# Altium PCB 400432.PcbDoc (part 4 of 7)
Units mm, origin at the board's own origin, x right, y up, seen from the top; angles counter-clockwise.
Board outline 136.53 x 63.5 mm, 4 copper layers (Top Layer, Mid-Layer 1, Mid-Layer 2, Bottom Layer), stack 1.505 mm thick; 354 components, 245 nets, 1470 pads, 1957 vias.
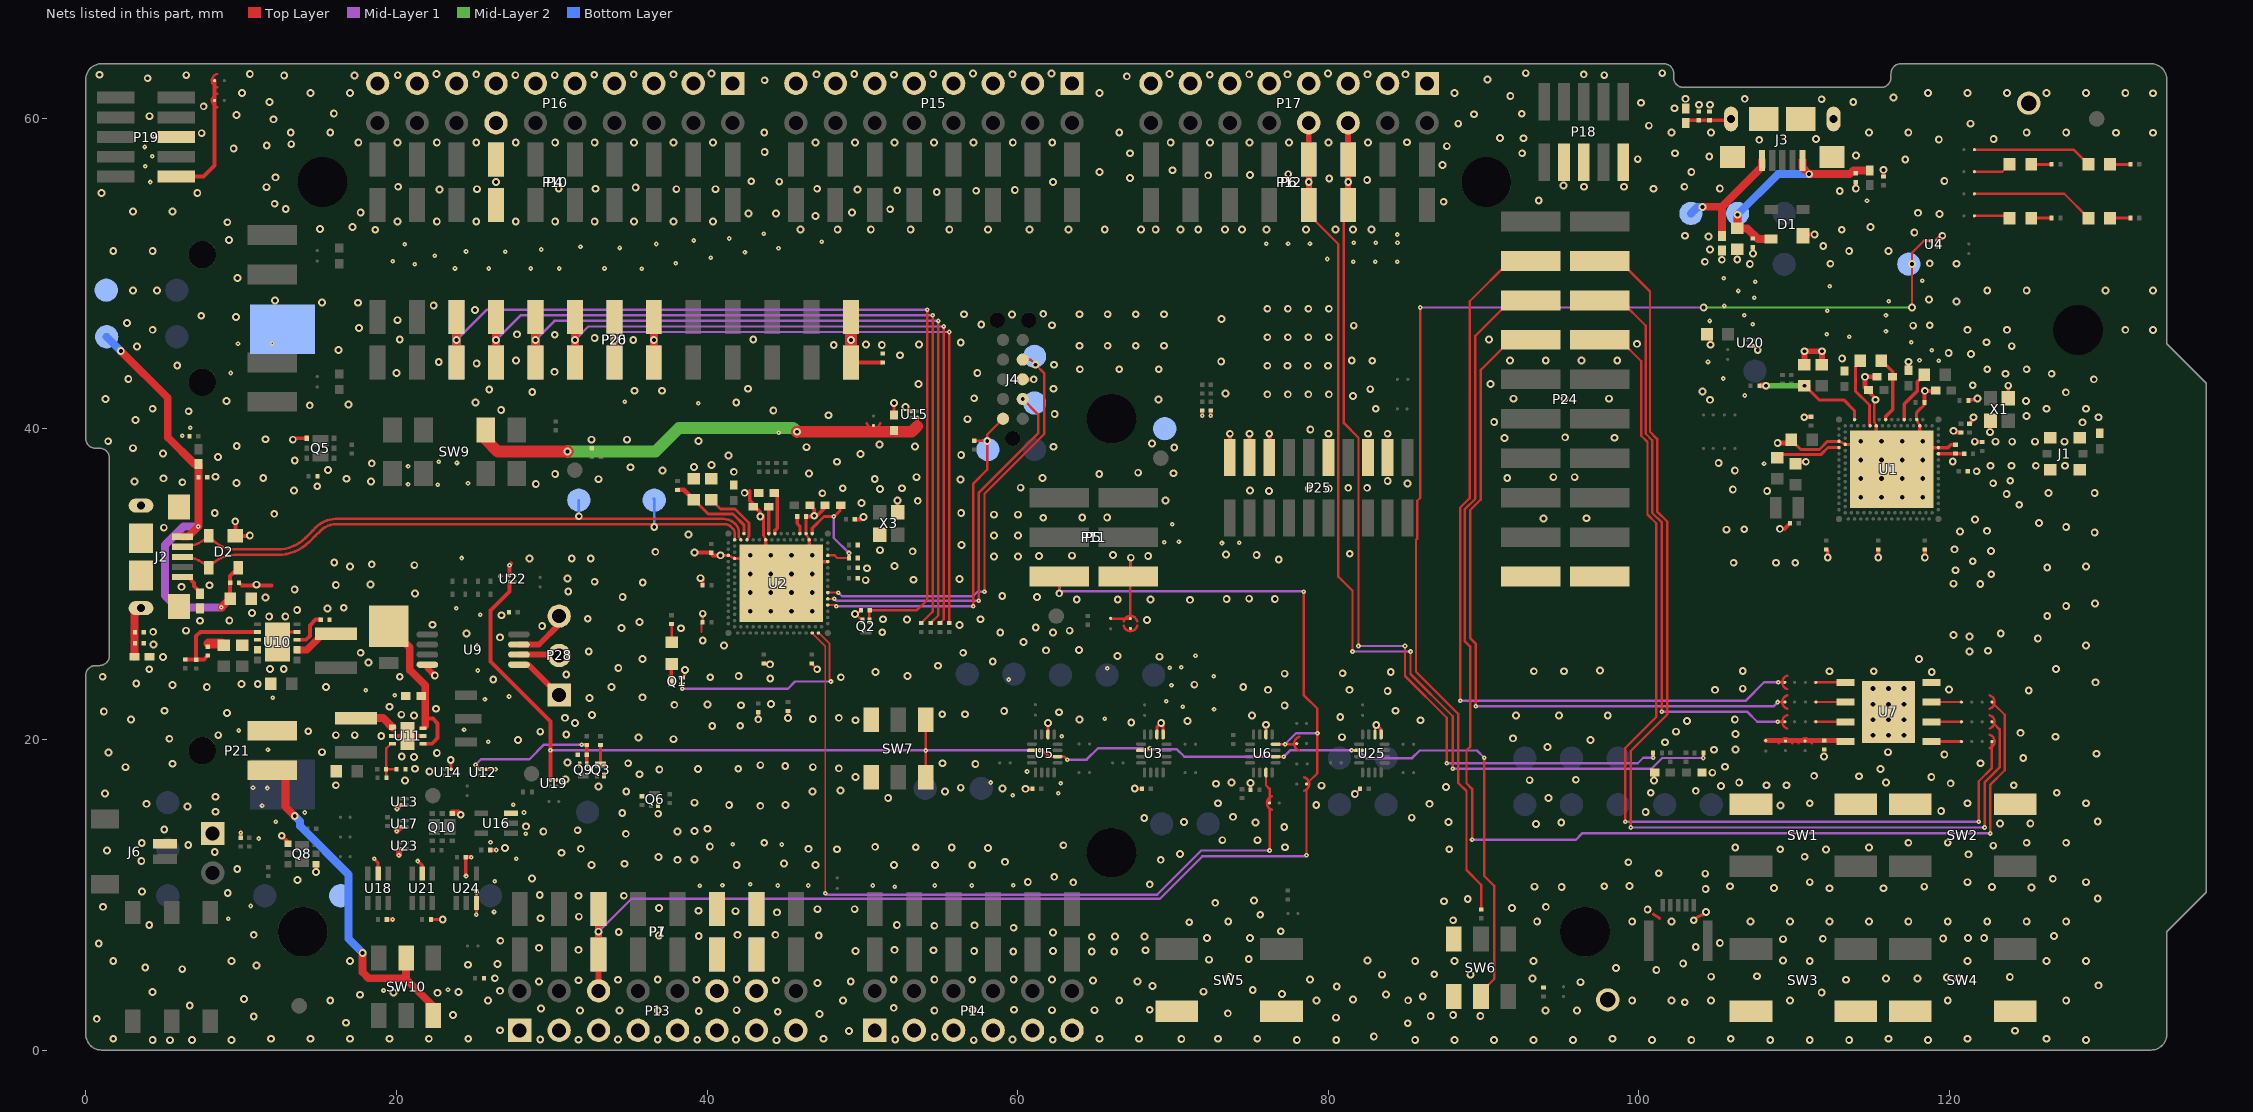
[diagram p5: the nets of this part, all layers, seen from the top]

## Via types
v1: diameter 0.5, hole 0.25, Top Layer to Bottom Layer, tented both sides, 1453 vias
v2: diameter 0.3, hole 0.1, Top Layer to Mid-Layer 1, tented top, 392 vias
v3: diameter 0.3, hole 0.1, Top Layer to Mid-Layer 1, tented both sides, 68 vias
v4: diameter 0.61, hole 0.305, Top Layer to Bottom Layer, tented both sides, 44 vias

## Nets (pads, with @x,y where several pads share a name; then routed paths per layer and width w, separated by ;. In a path a pad name is that pad's centre, name@x,y a point inside that pad or via, vN(x,y) a via of type N, cw(c..) or ccw(c..) an arc to the next point about the centre after c; other vN are vias at no path point) (continued)
GND: Bat1.2 C1.1 C2.2 C3.1 C4.2 C5.1 C6.2 C7.1 C8.2 C9.2 C10.2 C11.2 C12.2 C13.2 C14.2 C15.2 C16.1 C17.2 C18.2 C19.2 C20.2 C21.1 C22.2 C23.2 C24.1 C25.2 C26.1 C27.2 C28.1 C29.1 C30.2 C31.2 C32.2 C33.2 C34.2 C35.2 C36.2 C37.2 C38.1 C39.1 C40.2 C41.1 C42.1 C43.2 C44.1 C45.1 C46.1 C47.1 C48.1 C49.2 C50.1 C51.1 C52.1 C53.1 C54.1 C55.1 C56.1 C57.1 C59.1 C60.1 C61.1 C63.1 C64.1 C65.1 C66.1 C67.1 C68.1 C69.1 C70.1 C71.1 C72.2 C73.2 C74.1 D1.1 D2.1 FB3.2 FB4.2 FB5.2 FB6.2 J1.2 J4.3 J6.1 P1.6 P1.7 P4.7 P7.6 P7.7 P10.7 P13.1 P13.3 P13.5 P13.7 P13.9 P13.11 P13.12 P13.13 P13.14 P13.15 P14.1 P14.3 P14.5 P14.7 P14.9 P14.11 P15.1 P15.3 P15.5 P15.7 P15.9 P15.11 P15.13 P15.15 P16.1 P16.3 P16.5 P16.7 P16.9 P16.11 P16.13 P16.14 P16.15 P16.17 P16.19 P17.1 P17.3 P17.5 P17.7 P17.9 P17.11 P17.13 P17.15 P18.3 P18.5 P18.9 P19.5 P21.1 P24.19 P24.20 P25.3 P25.5 P25.9 P25.15 P25.17 P25.19 P27.1 Q1.2 Q2.2 Q3.2 Q5.1 Q6.2 Q8.1 Q8.4 Q9.2 Q10.1 R9.2 R11.2 R13.2 R25.2 R50.2 R52.2 R55.1 R56.1 R61.2 R62.1 R63.1 R66.2 R70.2 R73.2 R75.1 SB32.1 SW1.1 SW2.1 SW3.1 SW4.1 SW5.1 SW6.1 SW6.4 SW7.1 SW7.4 TP12.1 TP39.1 TP40.1 TP41.1 U1.104 U1.A25 U1.B12 U1.B26 U1.G1 U1.H2 U1.J31 U2.104 U2.A25 U2.B12 U2.B26 U2.G1 U2.H2 U2.J31 U3.5 U3.6 U4.B1 U5.6 U6.6 U7.4 U7.9 U9.4 U10.4 U10.8 U10.9 U10.11 U11.2 U11.5 U11.7 U12.B1 U13.B1 U14.B1 U15.B1 U16.3 U17.B1 U18.2 U19.B1 U20.B1 U21.2 U22.B1 U23.B1 U24.3 U25.5 U25.6 X1.2 X1.4 X3.2 X3.4 | length 109.7
  Top Layer w0.152: Q1.2@38.399,23.974 38.583,24.157 v1(38.583,24.46) ; 39.649,26.924 39.649,27.482 C36.2@39.716,27.548 39.716,28.083 v1(39.726,28.092) ; v1(43.301,21.291) R9.2@43.301,21.741 ; v1(45.216,21.379) R13.2@45.216,21.828 ; C30.2@46.751,24.888 46.751,24.852 v1(47.092,24.511) ; v1(49.53,28.067) 49.572,28.067 Q2.2@50.003,27.636 ; v1@49.651,28.067 R25.2@49.905,28.321 ; v1(81.709,16.487) C24.1@82.036,16.815 ; v1@82.982,20.93 83.004,20.907 v1@83.004,20.85 ; U25.6@83.004,20.316 v1@83.004,20.85 ; v1(83.083,20.93) v1@83.004,20.85 ; P24.19@92.075,30.251 92.304,30.48 P24.19@93.027,30.48
  Top Layer w0.165: U2.A25@46.376,33.248 U2.B26@46.576,32.848 ; U1.A25@117.878,40.589 U1.B26@118.078,40.189 U1.A25@117.878,40.589
  Top Layer w0.187: v1(40.876,31.848) U2.G1@41.376,31.848 U2.H2@41.776,31.648 U2.104@42.476,31.648 ; 43.645,33.118 U2.B12@43.776,32.848 ; 43.645,33.122 v1@43.645,34.448 ; 114.981,42.21 115.147,42.045 115.147,40.463 ; 115.147,40.459 U1.B12@115.278,40.189 ; 110.421,38.67 C20.2@109.803,39.289 110.421,38.67 ; 110.421,38.67 111.618,38.67 ; 110.421,38.67 111.618,38.67 ; 111.618,38.67 112.137,39.189 ; 111.618,38.67 112.137,39.189 ; 112.137,39.189 U1.G1@112.878,39.189 ; 112.137,39.189 U1.G1@112.878,39.189 ; U1.G1@112.878,39.189 U1.H2@113.278,38.989 ; U1.G1@112.878,39.189 U1.H2@113.278,38.989 ; U1.H2@113.278,38.989 113.978,38.989 U1.H2@113.278,38.989
  Top Layer w0.2: U2.A25@46.376,33.248 C73.2@46.376,34.344 ; U1.A25@117.878,40.589 117.878,41.039 ; C6.2@118.382,41.689 C6.2@118.382,41.545 ; 117.878,41.039 117.953,41.114 ; 117.878,41.039 117.953,41.114 ; 117.953,41.114 117.953,41.116 ; 117.953,41.116 C6.2@118.382,41.545 ; 117.953,41.116 C6.2@118.382,41.545
  Top Layer w0.203: U10.11@12.344,25.984 U10.11@12.994,26.634 ; U10.11@12.994,26.914 U10.4@13.614,26.914 ; v1@13.284,39.385 Q5.1@14.168,39.385 ; v2(18.567,12.319) 18.821,12.065 U18.2@18.821,11.364 ; v2(21.387,12.167) 21.666,11.887 U21.2@21.666,11.364 ; C71.1@22.231,8.407 v1(22.987,8.407) ; U14.B1@23.517,18.082 v1@23.517,18.691 ; v2(25.146,8.712) 25.161,8.727 U24.3@25.161,9.464 v2(25.161,10.17) ; U12.B1@25.778,18.082 v2(26.387,18.082) ; U19.B1@30.319,17.386 30.859,17.386 v1(30.884,17.412) ; C66.1@52.045,40.886 v1(52.045,41.656) ; v1(60.503,16.815) C42.1@60.954,16.815 ; U5.6@61.947,20.316 v1(61.947,21.053) ; v1(67.539,16.84) 67.564,16.815 C41.1@67.999,16.815 ; U3.6@68.966,20.316 68.966,20.782 v1(69.24,21.057) 69.366,20.931 U3.5@69.366,20.316 ; C45.1@74.992,16.815 v1(74.992,17.184) ; U6.6@75.985,20.316 v1(75.985,20.941) ; v1(83.083,20.93) 83.404,20.609 U25.5@83.404,20.316 ; 100.94,8.738 101.321,8.484 ; 103.708,8.534 104.115,8.712 ; C52.1@107.326,51.683 107.326,51.297 v1(107.34,51.283) ; C20.2@109.598,39.084 C20.2@109.803,39.289
  Top Layer w0.225: U2.104@43.376,31.448 U2.104@44.776,30.048 U2.104@45.071,30.048 ; U2.104@43.776,31.448 U2.B12@43.776,32.848 ; U2.104@46.176,31.448 U2.104@46.576,31.448 ; U2.B26@46.576,32.848 U2.104@46.576,31.448 ; U2.J31@47.776,31.448 U2.104@46.576,31.448 ; v2(71.882,40.843) C28.1@71.882,41.168 ; v2(72.441,40.843) C29.1@72.441,41.168 ; U1.104@115.278,38.789 U1.B12@115.278,40.189 ; C2.2@117.278,43.739 117.278,44.238 v1(117.353,44.313) ; C2.2@117.353,43.739 117.353,44.314 v1@117.428,44.389 ; U1.B26@118.078,40.189 U1.104@118.078,38.789 ; U1.104@116.278,37.389 116.573,37.389 U1.104@116.278,37.389 ; U1.104@116.278,37.389 114.878,38.789 U1.104@116.278,37.389 ; U1.104@118.078,38.789 117.678,38.789 U1.104@118.078,38.789 ; U1.104@118.078,38.789 119.893,38.789 ; U1.104@118.078,38.789 U1.J31@119.278,38.789 119.893,38.789 ; 119.893,38.789 120.078,38.974 ; 119.893,38.789 120.078,38.974 ; 120.078,38.974 C1.1@120.378,38.974 120.078,38.974 ; v1(120.253,39.864) 120.363,39.754 v1(120.253,39.864) ; v1@121.728,41.864 v1(121.803,41.939) v1@121.728,41.864
  Top Layer w0.25: v1(12.624,13.792) 13.014,13.402 Q8.1@13.014,13.274 ; v1(14.834,11.455) 14.864,11.425 Q8.4@14.864,11.974 ; C68.1@19.386,8.407 v2(19.761,8.407) ; U11.2@19.751,20.218 U11.7@20.726,20.218 U11.5@21.701,20.218 ; v2(20.041,15.519) U13.B1@20.298,15.777 ; v2(24.486,11.201) 24.466,11.221 C69.1@24.466,12.421 v2(24.816,12.421) ; C70.1@26.041,12.878 v2(26.441,12.878) ; U22.B1@27.283,30.553 v2(27.283,31.22) v2@27.381,31.318 ; Q9.2@31.799,18.39 Q9.2@31.804,18.384 ; v1(39.201,32.023) 40.208,32.023 C34.2@40.218,32.013 ; v1(39.573,30.378) 39.578,30.378 39.706,30.251 39.706,29.933 C35.2@39.716,29.923 ; C34.2@40.276,32.013 C34.2@40.218,32.013 ; v1(40.876,31.848) 40.383,31.848 C34.2@40.218,32.013 ; C74.1@42.976,35.073 43.401,34.648 v1@43.401,34.498 ; C37.2@43.653,24.888 43.997,24.888 v1(44.053,24.832) ; C73.2@46.376,34.344 46.847,34.344 v1(46.901,34.398) ; C25.2@46.626,35.073 46.901,34.798 v1(46.901,34.398) ; C26.1@47.601,35.073 47.601,34.912 47.088,34.398 v1(46.901,34.398) ; C33.2@49.511,34.165 49.917,34.165 v1(50.076,34.323) ; v1(52.781,41.402) 53.064,41.119 U15.B1@53.14,41.119 ; v1(104.608,45.404) C67.1@104.608,46.076 ; U20.B1@107.363,45.342 v1(107.645,45.06) ; v1(109.068,33.553) 109.357,33.553 C13.2@109.718,33.914 ; v1@110.578,40.714 v1@110.638,40.774 ; v1@110.668,40.716 110.668,40.744 v1@110.638,40.774 ; C12.2@111.078,40.774 v1@110.638,40.774 ; C14.2@112.051,32.229 112.151,32.129 v1(112.151,31.714) ; C7.1@114.778,42.414 114.981,42.21 ; v1(115.404,31.714) C15.2@115.404,32.229 ; C6.2@118.378,41.689 118.378,42.439 C3.1@119.078,42.439 ; v1(118.403,31.714) C8.2@118.403,32.229 ; C4.2@121.278,40.324 121.53,40.577 v1@121.53,40.763 ; v1(122.606,39.776) 122.606,40.496 X1.4@122.628,40.518 ; v1(123.774,42.774) 123.774,41.972 X1.2@123.778,41.968 ; v1@120.363,39.754 C10.2@120.728,39.754 v1@120.363,39.754 ; C11.2@121.213,41.864 121.728,41.864 C11.2@121.213,41.864
  Top Layer w0.254: v1(9.627,34.036) 9.63,34.033 D2.1@9.63,33.105 10.55,33.105 v1(10.566,33.122) ; C54.1@9.876,30.074 10.054,29.896 11.966,29.896 ; R66.2@9.982,13.693 v2(9.982,13.995) ; 42.751,35.998 42.751,35.378 C74.1@42.976,35.153 ; X3.4@51.104,33.155 X3.4@51.126,33.178 ; v1(52.272,35.382) 52.272,34.631 X3.2@52.276,34.628 ; J4.3@60.325,43.18 v1(61.036,43.18) ; P25.19@73.66,38.145 v1(73.66,39.675) ; P25.17@74.93,38.145 v1(74.93,39.675) ; P25.15@76.2,38.145 v1(76.2,39.675) ; C19.2@110.078,37.739 110.21,37.871 v1(110.744,37.871) ; D1.1@110.556,52.41 110.657,52.512 v1(111.313,52.512) ; v1(113.963,55.467) C47.1@113.963,55.874 ; C48.1@115.748,56.241 v1(115.748,56.667) ; v1(121.615,39.167) 121.641,39.141 C21.1@122.098,39.141
  Top Layer w0.305: v1(108.928,39.084) C20.2@109.598,39.084 ; C7.1@114.778,42.414 114.553,42.639 v1(114.553,43.339) 114.558,43.344 C5.1@115.328,43.344
  Top Layer w0.381: v2(20.028,14.097) U17.B1@20.237,14.307 ; v2(20.168,12.548) 20.168,12.827 U23.B1@20.231,12.89 ; U9.4@21.993,24.806 21.993,24.591 v1(22.479,24.105) ; Q10.1@23.601,15.301 v1@23.967,15.301 ; C17.2@110.653,44.119 v1(110.653,44.989) 111.708,44.989 v1@111.778,44.919 ; C18.2@111.778,44.119 v1@111.778,44.919 ; v1(111.778,44.989) v1@111.778,44.919 ; U4.B1@119.253,52.146 v1(119.532,52.426)
  Top Layer w0.635: 7.899,26.179 C60.1@8.76,26.179
  other v1: 4.312,0.647 5.436,0.635 6.852,0.647 9.392,0.647 44.475,0.635 57.175,0.635 77.972,0.647 80.512,0.647 85.592,0.647 88.132,0.647 90.672,0.647 93.212,0.647 95.752,0.647 100.832,0.647 103.372,0.647 108.452,0.647 110.992,0.647 113.532,0.647 118.612,0.647 128.772,0.647 31.725,0.66 39.37,0.66 62.255,0.66 29.261,0.686 34.265,0.686 36.83,0.686 41.859,0.686 52.121,0.686 59.665,0.686 1.772,0.723 11.932,0.723 14.472,0.723 17.012,0.723 19.552,0.723 22.092,0.723 24.632,0.723 47.492,0.723 65.272,0.723 67.812,0.723 70.536,0.711 72.892,0.723 75.432,0.723 98.292,0.723 105.912,0.723 116.072,0.723 121.152,0.723 126.232,0.723 54.661,0.838 82.931,0.864 49.149,1.219 124.206,1.245 26.67,1.27 85.115,1.727 16.764,1.753 0.711,2.007 80.493,2.083 10.82,2.159 86.589,2.184 89.789,2.184 23.647,2.261 88.036,2.261 47.244,2.311 73.533,2.362 44.552,2.464 39.472,2.515 31.826,2.54 34.366,2.54 36.83,2.54 54.635,2.54 93.98,2.54 96.012,2.54 41.91,2.565 62.205,2.565 64.948,2.565 57.099,2.591 59.766,2.591 68.504,2.591 29.312,2.667 52.019,2.718 6.696,2.87 102.946,3.073 15.742,3.187 25.902,3.187 48.762,3.187 66.542,3.187 79.242,3.187 99.562,3.187 102.102,3.187 104.642,3.187 109.722,3.187 119.882,3.187 127.502,3.187 85.141,3.2 81.585,3.251 10.185,3.277 86.081,3.454 17.653,3.556 83.718,3.581 77.013,3.607 22.657,3.683 19.812,3.708 111.76,3.708 4.309,3.734 24.003,3.734 71.958,3.759 26.67,3.81 75.133,3.861 80.543,4.089 68.682,4.115 129.591,4.166 47.117,4.318 96.241,4.369 29.185,4.42 49.251,4.42 67.716,4.42 64.846,4.47 31.725,4.496 44.45,4.496 34.265,4.521 39.319,4.521 57.074,4.521 113.335,4.521 36.83,4.547 41.91,4.547 52.019,4.547 54.635,4.547 59.741,4.547 62.205,4.547 78.816,4.547 93.142,4.597 115.9,4.597 117.932,4.597 26.34,4.623 120.574,4.623 119.812,4.674 73.635,4.699 123.876,4.699 104.648,4.724 107.594,4.75 83.464,4.851 89.154,4.851 86.817,4.877 101.117,5.156 6.214,5.207 98.527,5.283 3.835,5.309 10.998,5.436 24.613,5.486 26.518,5.537 102.845,5.563 1.772,5.727 9.392,5.727 17.012,5.727 85.592,5.727 88.132,5.727 93.212,5.727 110.992,5.727 121.152,5.727 126.232,5.727 128.772,5.727 82.525,5.766 109.271,5.766 72.314,5.817 74.879,5.867 59.715,6.35 64.77,6.35 66.218,6.35 49.555,6.375 57.201,6.375 62.281,6.375 54.585,6.426 68.224,6.426 31.725,6.452 52.07,6.452 29.185,6.579 103.657,6.629 0.838,6.858 105.207,6.883 26.695,7.036 109.271,7.137 111.836,7.163 119.583,7.188 72.187,7.214 74.955,7.214 121.183,7.214 122.225,7.214 64.77,7.29 66.269,7.315 68.174,7.315 39.472,7.341 126.721,7.341 36.906,7.366 47.193,7.366 10.82,7.417 41.961,7.417 44.399,7.417 62.281,7.569 34.315,7.595 76.937,7.645 59.741,7.874 54.635,8.001 57.226,8.026 4.089,8.052 52.222,8.052 71.044,8.23 99.562,8.267 102.102,8.267 107.182,8.267 109.722,8.267 112.262,8.267 114.802,8.267 117.342,8.267 119.882,8.267 122.422,8.267 124.962,8.267 127.502,8.267 73.558,8.28 93.447,8.28 88.036,8.357 103.53,8.357 29.286,8.484 31.75,8.585 75.616,8.712 44.501,8.865 104.318,8.89 41.834,8.941 39.446,8.966 100.559,9.042 47.117,9.068 49.505,9.068 36.906,9.144 91.821,9.144 1.118,9.22 94.005,9.22 72.72,9.474 87.452,9.576 75.209,9.627 88.976,9.728 129.54,9.754 31.725,9.931 34.646,9.931 29.235,9.982 9.144,10.109 3.632,10.211 104.292,10.363 112.268,10.414 115.748,10.414 108.687,10.439 125.273,10.465 95.021,10.49 122.733,10.49 93.269,10.516 118.364,10.516 97.765,10.541 105.867,10.541 99.39,10.566 68.504,10.668 63.576,10.795 110.992,10.807 121.152,10.807 128.772,10.807 60.655,10.82 13.64,10.947 126.644,11.024 28.727,11.049 62.357,11.151 104.267,11.354 101.27,11.379 9.754,11.659 32.563,11.913 41.91,11.913 46.99,11.913 52.032,11.913 54.686,11.913 57.074,11.913 34.696,11.989 44.958,12.014 99.314,12.09 59.182,12.116 3.581,12.167 38.1,12.243 69.215,12.243 39.192,12.268 36.881,12.421 110.668,12.446 121.209,12.598 70.46,12.624 30.632,12.7 8.306,12.751 1.372,12.852 112.039,12.903 48.362,12.929 87.782,12.929 109.093,12.929 31.877,12.954 46.533,12.954 27,13.005 58.09,13.005 55.753,13.03 106.197,13.03 114.808,13.03 53.442,13.056 77.216,13.056 50.825,13.081 40.183,13.106 122.809,13.157 62.941,13.183 6.604,13.208 3.607,13.335 43.682,13.347 117.342,13.347 119.882,13.347 124.962,13.347 127.502,13.347 73.177,13.513 75.438,13.513 34.773,13.919 29.464,14.072 38.1,14.072 39.192,14.097 31.674,14.148 5.055,14.199 40.03,14.249 77.165,14.351 28.346,14.402 93.37,14.554 123.241,14.58 125.197,14.58 75.311,14.656 94.996,14.656 70.714,14.681 87.732,14.681 129.54,14.707 68.148,14.935 85.369,14.961 73.863,15.011 24.145,15.149 36.855,15.215 34.544,15.265 100.432,15.316 8.357,15.342 119.456,15.392 6.553,15.672 43.434,15.723 109.118,15.748 41.427,15.773 45.06,15.773 79.223,15.773 3.912,15.85 86.512,15.85 72.892,15.887 110.992,15.887 121.152,15.887 128.772,15.887 39.192,15.926 51.664,16.231 94.183,16.231 8.357,16.307 1.245,16.51 100.762,16.561 126.898,16.561 34.798,16.637 46.787,16.637 55.321,16.637 103.657,16.688 48.59,16.713 59.03,16.84 56.337,16.891 87.579,16.942 33.02,16.967 105.283,16.993 79.553,17.018 16.104,17.043 108.204,17.043 109.499,17.043 124.13,17.043 72.771,17.145 120.066,17.17 73.762,17.221 106.451,17.221 115.9,17.221 20.549,17.348 100.965,17.348 92.964,17.374 95.936,17.399 49.555,17.577 118.821,17.577 114.173,17.628 111.277,17.653 35.662,17.755 104.724,17.856 22.123,17.932 36.932,18.059 39.421,18.085 115.545,18.085 21.209,18.11 42.012,18.11 48.489,18.136 2.565,18.212 46.812,18.212 105.537,18.237 45.034,18.288 43.434,18.339 5.582,18.427 57.277,18.415 34.925,18.466 55.169,18.466 121.996,18.466 31.013,18.517 23.499,18.673 124.739,18.796 21.133,18.872 20.345,18.898 111.912,18.898 119.659,19.025 129.464,19.075 22.606,19.126 1.473,19.152 15.215,19.177 116.027,19.177 104.826,19.329 106.223,19.355 94.107,19.507 101.676,19.812 27.838,19.964 96.876,19.964 37.846,20.015 5.385,20.041 91.897,20.066 35.585,20.117 80.874,20.142 126.822,20.168 19.025,20.218 8.534,20.269 16.104,20.269 17.323,20.269 30.937,20.32 106.223,20.345 124.562,20.422 29.261,20.498 102.387,20.498 14.326,20.523 40.335,20.853 42.139,20.879 31.496,21.057 67.31,21.082 70.942,21.184 103.099,21.184 49.555,21.234 85.928,21.234 2.921,21.285 63.983,21.285 106.172,21.285 46.812,21.311 30.861,21.387 48.489,21.387 80.772,21.438 21.133,21.539 75.082,21.539 92.075,21.539 94.844,21.539 97.993,21.539 32.588,21.565 20.32,21.59 55.143,21.615 56.617,21.615 9.093,21.692 62.662,21.742 1.168,21.793 59.131,21.819 5.08,21.844 84.328,21.844 22.555,21.971 19.558,22.098 77.191,22.174 42.189,22.2 37.897,22.225 40.03,22.25 44.12,22.276 32.436,22.657 35.839,22.708 83.82,23.114 125.095,23.139 76.124,23.19 81.356,23.19 104.902,23.19 119.964,23.216 106.68,23.266 7.798,23.368 15.469,23.368 33.858,23.368 74.524,23.368 5.582,23.507 71.374,23.52 10.033,23.571 11.074,23.571 3.251,23.597 129.388,23.673 26.238,23.851 44.069,23.927 40.208,24.003 48.616,24.003 1.092,24.028 20.218,24.028 42.037,24.079 52.908,24.079 30.937,24.181 77.191,24.232 80.924,24.257 50.851,24.333 84.023,24.333 118.847,24.333 93.231,24.384 95.174,24.384 112.268,24.384 115.113,24.384 106.68,24.409 97.485,24.435 4.089,24.511 11.862,24.536 12.751,24.536 126.848,24.536 34.29,24.587 54.864,24.74 18.212,24.943 58.395,25.019 35.839,25.171 118.034,25.171 4.978,25.298 69.139,25.324 66.421,25.375 17.704,25.578 56.49,25.578 32.385,25.654 121.285,25.654 122.479,25.705 61.824,25.73 63.957,25.756 41.097,26.035 128.772,26.047 4.369,26.111 60.376,26.264 39.726,26.365 125.679,26.492 26.67,26.568 121.285,26.619 120.244,26.721 24.511,26.822 123.292,26.822 58.877,26.873 62.281,26.873 51.283,26.899 4.343,26.924 6.452,27 63.348,27 38.329,27.153 34.493,27.178 61.163,27.203 29.388,27.305 56.261,27.356 22.327,27.381 35.662,27.559 7.366,27.635 9.246,27.661 68.326,27.686 52.883,27.711 51.333,27.737 57.607,27.737 32.324,27.762 11.811,27.915 12.852,27.915 126.289,27.94 26.772,27.991 10.708,28.144 13.614,28.321 15.57,28.423 16.612,28.473 127.502,28.587 129.362,28.753 71.095,28.981 63.805,29.007 66.446,29.007 68.555,29.007 73.457,29.032 76.556,29.032 74.905,29.058 11.582,29.134 34.569,29.159 61.239,29.159 59.004,29.235 21.209,29.388 31.064,29.515 13.452,29.642 6.172,29.82 7.976,29.921 10.988,29.959 16.104,29.947 18.339,29.972 121.971,29.997 120.244,30.023 35.865,30.099 32.766,30.15 50.216,30.251 53.289,30.277 56.261,30.328 31.013,30.353 122.682,30.632 120.371,30.886 50.292,31.013 126.289,31.064 17.012,31.127 128.772,31.127 52.07,31.166 21.158,31.217 18.415,31.267 106.096,31.37 108.814,31.37 110.058,31.37 16.002,31.394 121.488,31.471 76.81,31.572 28.575,31.648 31.293,31.648 32.512,31.648 58.471,31.775 60.02,31.775 61.366,31.801 68.402,31.801 63.5,31.826 66.142,31.877 75.387,31.877 73.406,31.902 81.382,31.953 36.674,32.074 53.238,32.106 122.657,32.131 51.13,32.182 120.32,32.233 56.388,32.512 58.471,33.122 60.02,33.122 38.811,33.198 129.337,33.325 120.675,33.376 122.403,33.426 105.639,33.503 106.782,33.528 5.029,33.63 127.502,33.667 125.755,33.934 121.641,34.163 93.853,34.214 96.622,34.239 61.646,34.265 64.16,34.29 65.761,34.29 43.426,34.348 58.471,34.468 60.02,34.468 12.141,34.519 8.306,34.569 56.363,34.569 124.485,35.103 49.951,35.223 53.569,35.357 69.52,35.382 123.673,35.789 47.426,35.848 42.426,35.873 126.365,35.865 129.337,35.865 76.175,35.992 108.255,35.992 13.411,36.017 74.955,36.017 106.045,36.093 51.129,36.119 48.741,36.169 52.551,36.169 78.74,36.144 80.035,36.144 60.192,36.207 81.28,36.195 82.499,36.195 14.91,36.297 28.981,36.449 85.09,36.474 122.803,36.489 9.703,36.5 6.223,36.551 3.15,36.601 18.364,36.601 83.82,36.627 123.901,36.652 56.312,36.728 33.02,36.754 50.798,36.766 16.789,36.779 5.004,36.805 11.43,36.83 61.595,36.83 91.516,36.83 53.492,36.881 94.488,36.881 95.86,36.881 8.357,36.906 30.226,37.084 65.253,37.084 46.558,37.109 70.028,37.135 67.759,37.17 41.726,37.223 121.742,37.262 37.135,37.313 106.172,37.313 15.596,37.338 35.077,37.516 39.167,37.541 122.631,37.617 123.988,37.617 125.552,37.617 127.422,37.617 40.284,37.668 18.415,37.77 105.131,37.795 48.362,37.871 120.203,37.889 13.462,37.948 8.509,38.176 41.377,38.278 56.363,38.303 49.886,38.379 4.978,38.405 3.042,38.747 70.079,38.786 46.406,38.811 62.306,38.837 53.391,38.862 9.728,38.887 51.105,38.989 68.656,39.04 122.961,39.167 124.028,39.167 125.501,39.167 127.397,39.167 1.448,39.192 39.446,39.218 13.335,39.294 32.563,39.294 34.849,39.294 11.582,39.319 91.338,39.395 98.425,39.421 95.25,39.446 80.01,39.675 82.55,39.675 83.82,39.675 78.842,39.954 128.549,40.411 90.678,40.437 3.2,40.564 56.769,40.615 121.53,40.738 110.642,40.742 129.591,40.742 124.943,40.818 47.828,40.869 62.382,40.945 6.629,41.123 44.272,41.173 26.746,41.199 4.312,41.287 83.052,41.287 126.232,41.287 128.772,41.287 14.427,41.504 16.916,41.554 25.095,41.681 41.885,41.681 9.068,41.783 124.917,41.783 104.572,41.859 115.228,41.864 69.063,41.885 1.27,41.91 91.923,41.935 95.199,41.935 98.069,41.935 57.201,41.961 81.585,42.113 76.073,42.215 77.394,42.215 78.715,42.215 80.035,42.215 73.381,42.266 127.483,42.342 28.753,42.367 104.089,42.393 118.403,42.439 35.331,42.443 37.109,42.443 25.984,42.52 82.702,42.545 42.647,42.57 62.306,42.57 121.488,42.799 53.619,42.875 90.449,42.875 129.286,43.18 2.743,43.205 123.596,43.536 126.568,43.536 20.015,43.586 57.404,43.586 30.175,43.663 64.002,43.827 66.542,43.827 69.082,43.827 122.422,43.827 124.962,43.827 76.073,44.052 77.377,44.052 78.681,44.052 79.985,44.052 5.893,44.069 62.332,44.12 25.171,44.196 22.733,44.298 73.101,44.323 82.829,44.374 27.711,44.399 81.509,44.399 91.694,44.399 93.997,44.399 96.3,44.399 98.603,44.399 113.081,44.526 52.426,44.729 121.378,44.814 119.939,44.882 16.281,45.06 3.302,45.288 124.003,45.314 63.983,45.339 65.794,45.339 67.606,45.339 69.418,45.339 48.158,45.39 51.257,45.39 50.241,45.415 53.645,45.415 99.873,45.466 56.337,45.542 122.377,45.568 35.255,45.72 20.218,45.745 42.977,45.745 90.348,45.745 32.766,45.847 76.073,45.889 77.394,45.889 78.715,45.889 80.035,45.889 30.201,46.05 27.762,46.076 4.312,46.367 121.152,46.367 123.692,46.367 131.312,46.367 133.096,46.355 17.602,46.482 81.636,46.634 117.653,46.634 62.205,46.66 118.72,46.66 57.658,46.711 2.667,46.812 20.066,46.99 73.127,47.066 9.677,47.193 7.442,47.269 59.639,47.346 56.54,47.371 63.983,47.371 65.794,47.371 67.606,47.371 69.418,47.371 61.646,47.396 25.07,47.65 76.073,47.727 77.394,47.727 78.715,47.727 80.035,47.727 22.403,47.93 17.526,48.108 15.215,48.133 120.447,48.184 12.192,48.26 118.669,48.311 3.042,48.907 4.582,48.907 122.422,48.907 124.962,48.907 130.042,48.907 133.096,48.895 9.779,49.708 107.137,50.597 112.319,50.622 120.447,50.622 118.72,50.648 104.242,50.749 105.334,50.876 106.324,50.902 1.772,51.447 4.312,51.447 113.532,51.447 116.072,51.447 104.572,51.537 111.862,51.765 9.22,52.146 104.47,52.375 102.972,52.426 117.729,52.629 18.644,52.807 113.055,52.807 46.025,52.832 48.412,52.832 50.546,52.832 53.111,52.832 55.601,52.832 58.09,52.832 60.757,52.832 63.271,52.832 65.608,52.832 67.945,52.832 68.885,52.832 70.485,52.832 71.628,52.832 73.355,52.832 74.447,52.832 76.022,52.832 78.562,52.832 80.467,52.832 81.585,52.832 82.779,52.832 15.088,52.857 17.17,52.984 114.91,52.984 9.119,53.289 20.066,53.34 22.606,53.34 25.146,53.34 27.686,53.34 30.226,53.34 32.766,53.34 35.306,53.34 37.846,53.34 40.386,53.34 46.99,53.696 119.355,53.823 42.672,53.848 44.45,53.848 117.958,53.899 17.704,53.924 49.327,53.924 3.042,53.987 5.582,53.987 51.791,54.127 12.878,54.153 12.167,54.483 87.427,54.61 93.548,54.686 1.016,55.169 7.188,55.169 54.788,55.245 112.928,55.296 57.328,55.321 52.248,55.347 59.817,55.372 22.784,55.397 49.682,55.397 25.197,55.423 38.024,55.423 40.538,55.423 30.455,55.448 32.817,55.448 47.092,55.448 100.94,55.448 105.207,55.474 35.408,55.524 11.633,55.55 20.117,55.575 96.469,55.575 99.035,55.575 102.921,55.575 95.148,55.651 26.416,55.89 62.281,55.88 44.653,55.905 42.85,55.931 119.659,55.956 82.499,56.007 80.061,56.109 67.234,56.134 12.217,56.185 72.263,56.312 74.955,56.337 77.419,56.388 65.272,56.527 103.372,56.527 69.977,56.642 87.351,56.972 117.145,57.328 99.924,57.353 104.521,57.531 113.97,57.582 67.234,57.734 92.481,57.734 102.311,57.734 43.713,57.81 9.525,58.039 87.63,58.191 11.659,58.242 13.233,58.318 17.551,58.42 20.066,58.42 22.606,58.42 25.146,58.42 27.686,58.42 30.226,58.42 32.766,58.42 35.306,58.42 37.846,58.42 40.386,58.42 46.99,58.42 49.53,58.42 52.07,58.42 54.61,58.42 57.15,58.42 59.69,58.42 62.23,58.42 69.85,58.42 72.39,58.42 74.93,58.42 77.47,58.42 80.01,58.42 82.55,58.42 85.065,58.445 107.747,58.598 119.304,58.623 111.404,58.649 122.834,58.649 92.558,58.699 91.059,58.725 7.467,59.03 13.202,59.067 15.742,59.067 43.682,59.067 66.542,59.067 102.102,59.067 104.642,59.067 114.802,59.067 117.342,59.067 124.962,59.067 127.502,59.067 130.708,59.055 133.096,59.055 100.635,59.512 88.367,59.639 121.336,59.639 12.09,59.919 4.115,60.122 9.703,60.198 89.383,60.249 92.456,60.274 15.977,60.3 102.286,60.63 7.595,60.757 103.861,60.858 104.572,60.858 100.127,60.985 11.831,61.041 113.792,61.036 111.76,61.214 102.997,61.239 106.807,61.239 116.383,61.316 91.719,61.417 14.472,61.607 17.012,61.607 65.272,61.607 88.132,61.607 118.612,61.607 121.152,61.607 123.692,61.607 126.232,61.607 128.772,61.607 131.312,61.607 133.096,61.595 10.058,61.62 43.713,62.433 90.246,62.484 3.988,62.56 67.031,62.687 12.776,62.738 17.297,62.738 6.477,62.763 20.091,62.763 27.661,62.763 30.201,62.763 97.765,62.763 0.889,62.789 32.741,62.789 52.045,62.789 72.365,62.789 25.146,62.814 35.281,62.814 37.846,62.814 47.041,62.814 59.665,62.814 74.905,62.814 77.368,62.814 82.525,62.814 84.963,62.814 96.444,62.814 10.566,62.84 22.581,62.84 49.479,62.84 54.559,62.84 69.774,62.84 40.284,62.865 57.125,62.865 62.179,62.865 79.985,62.865 92.71,62.89 101.498,62.89
  other v2: 19.177,3.835 23.325,3.886 9.169,8.458 26.289,8.89 10.617,9.271 52.095,10.516 39.522,10.566 44.552,10.592 46.507,10.592 50.673,10.592 54.661,10.592 57.048,10.592 40.996,10.617 59.715,10.617 42.774,10.668 26.34,10.871 27.711,12.319 44.806,13.233 41.656,13.259 26.06,13.386 11.151,13.614 28.321,13.919 12.243,14.707 14.097,15.291 28.219,15.291 11.354,15.723 27.534,15.799 59.69,16.408 62.611,16.535 11.684,16.866 10.77,16.891 62.763,17.17 58.268,17.221 60.604,17.932 11.735,19.329 25.908,19.837 62.84,20.193 9.855,20.574 24.359,20.625 65.608,21.336 72.644,21.946 70.637,22.098 69.571,22.454 25.705,22.581 12.04,22.682 27.254,22.758 19.888,22.835 18.034,23.165 69.901,23.495 59.436,23.851 72.619,24.054 25.248,24.435 65.761,24.587 69.799,24.613 70.536,24.638 71.45,25.375 25.197,26.06 25.4,28.016 23.851,28.448 26.68,30.505 24.206,31.674 73.152,32.639 74.27,32.664 69.444,32.69 70.383,32.715 69.952,33.858 22.657,36.398 20.752,36.424 24.613,36.5 20.752,37.592 108.052,37.744 23.901,37.795 22.733,37.871 6.223,39.548 44.628,39.751 6.731,40.056 39.446,41.631 34.696,41.732 106.807,42.139 105.435,43.231 9.347,43.586 104.445,44.298 119.293,44.374 118.059,44.399 118.847,45.06 9.804,45.466 12.014,45.491 117.526,45.568 113.538,45.923 112.09,46.076 115.9,46.279 107.315,46.736 104.546,46.939 106.782,47.295 115.9,47.295 112.116,47.6 105.486,47.904 116.078,48.209 107.417,48.438 106.401,48.87 112.293,49.174 107.493,49.454 118.237,49.53 105.461,49.682 35.789,50.292 23.774,50.317 25.959,50.317 28.651,50.317 30.48,50.317 33.401,50.317 21.184,50.597 37.998,50.648 81.61,50.749 83.02,50.749 84.43,50.749 19.761,50.775 79.934,50.927 40.234,51.003 22.479,51.13 42.443,51.359 27,51.384 24.486,51.41 29.337,51.537 44.602,51.613 34.392,51.638 31.852,51.714 20.549,51.867 36.728,51.892 75.997,51.918 77.406,51.918 78.816,51.918 81.636,51.968 83.045,51.968 84.455,51.968 47.396,52.045 39.141,52.121 41.427,52.248 84.43,52.502 43.663,52.553 114.681,54.686 4.166,55.88 3.835,56.896 4.293,57.531 3.81,58.141 4.293,58.801
  other v4: 115.06,20.268 116.06,20.268 117.06,20.268 115.06,21.268 116.06,21.268 117.06,21.268 115.06,22.268 116.06,22.268 117.06,22.268 115.06,23.268 116.06,23.268 117.06,23.268 42.776,28.248 44.109,28.248 45.443,28.248 46.776,28.248 42.776,29.448 44.109,29.448 45.443,29.448 46.776,29.448 42.776,30.648 44.109,30.648 45.443,30.648 46.776,30.648 42.776,31.848 44.109,31.848 45.443,31.848 46.776,31.848 114.278,35.589 115.611,35.589 116.944,35.589 118.278,35.589 114.278,36.789 115.611,36.789 116.944,36.789 118.278,36.789 114.278,37.989 115.611,37.989 116.944,37.989 118.278,37.989 114.278,39.189 115.611,39.189 116.944,39.189 118.278,39.189
I\F\_\O\F\F\: SW6.2 SW7.3 SW7.6 U3.10 U5.2 U5.10 U6.2 U19.B2 U22.B2 U25.10 | length 98.4
  Top Layer w0.152: SW7.3@54.071,17.56 54.071,19.273 v3(54.077,19.279) 54.077,21.255 SW7.6@54.071,21.26 ; U5.10@60.922,19.291 v2(61.417,19.291) 61.608,19.291 62.008,18.891 U5.2@62.572,18.891 62.579,18.898 62.992,18.898 v2(63.195,18.694) ; U3.10@67.941,19.291 68.364,19.291 v2(68.504,19.431) ; U6.2@76.61,18.891 v2(77.14,18.891) ; v2(81.496,19.291) U25.10@81.979,19.291 ; SW6.2@89.829,3.44 89.829,3.723 90.678,4.572 90.678,10.566 90.043,11.201 v2(90.043,18.821)
  Top Layer w0.254: U22.B2@27.283,30.153 27.283,29.518 26.06,28.296 26.06,25.019 29.919,21.161 U19.B2@29.919,17.386
  Mid-Layer 1 w0.152: v3(29.921,19.304) 29.934,19.291 v2(61.417,19.291) ; v2(63.195,18.694) 64.44,18.694 65.176,19.431 v2(68.504,19.431) 68.58,19.355 70.256,19.355 70.72,18.891 v2(77.14,18.891) 77.54,19.291 v2(81.496,19.291) 81.953,19.291 82.448,18.796 85.395,18.796 85.884,19.285 89.579,19.285 v2(90.043,18.821)
IMCU_BOOT: SB46.2 U2.AL27 U6.15 | length 51.7
  Top Layer w0.125: U2.AL27@46.776,26.824 47.614,25.986 v3(47.614,10.095)
  Top Layer w0.152: U6.15@75.985,17.866 75.985,17.043 76.218,16.811 SB46.2@76.218,15.9 ; v2(76.218,12.845) 76.218,15.547
  Mid-Layer 1 w0.152: v3(47.614,10.095) 47.701,10.008 68.986,10.008 71.824,12.845 v2(76.218,12.845)
IMCU_LED: Q1.1 U2.AL29 | length 13.5
  Top Layer w0.125: U2.AL29@47.176,26.824 47.229,26.824 47.876,26.177 47.876,23.828 v3(47.981,23.724)
  Top Layer w0.152: v3(38.399,23.261) Q1.1@38.399,23.524
  Mid-Layer 1 w0.152: v3(38.399,23.261) 45.206,23.261 45.669,23.724 v3(47.981,23.724)
IMCU_N: D2.2 J2.2 TP10.1 U2.B4 | length 38.9
  Top Layer w0.15: 41.834,33.858 41.845,33.847 cw(c41.349,33.35) 42.051,33.35 42.051,33.023 42.176,32.898 U2.B4@42.176,32.848
  Top Layer w0.165: J2.2@6.232,32.4 ccw(c6.232,34.797) 7.927,33.102 D2.2@7.93,33.105 8.238,32.797 ccw(c9.601,34.161) 9.601,32.233 12.355,32.233 ccw(c12.355,34.773) 14.151,32.977 14.588,33.414 14.84,33.666 cw(c16.106,32.4) 16.106,34.191 41.031,34.191 cw(c41.031,33.056) 41.834,33.858
  Bottom Layer w0.165: v1(31.75,34.366) TP10.1@31.75,35.408
IMCU_P: D2.3 J2.3 TP9.1 U2.B2 | length 39.3
  Top Layer w0.15: 41.681,33.553 cw(c41.453,33.325) 41.776,33.325 U2.B2@41.776,32.848
  Top Layer w0.165: J2.3@6.232,31.75 6.253,31.75 cw(c6.253,29.378) D2.3@7.93,31.055 8.151,31.276 cw(c9.601,29.826) 9.601,31.877 12.357,31.877 ccw(c12.357,34.767) 14.401,32.724 14.793,33.116 15.102,33.425 cw(c16.125,32.402) 15.107,33.43 cw(c16.125,32.402) 16.125,33.848 v1@36.601,33.848 ; v1(36.601,33.68) v1@36.601,33.848 ; 41.681,33.554 41.529,33.706 ccw(c41.185,33.362) 41.185,33.848 v1@36.601,33.848
  Bottom Layer w0.165: TP9.1@36.563,35.471 TP9.1@36.586,35.494 ; v1(36.601,33.68) TP9.1@36.601,35.408
IMCU_RESET: J4.10 R6.1 TP23.1 U2.AC31 | length 23.1
  Top Layer w0.152: U2.AC31@47.776,28.648 48.238,28.648 v3(48.311,28.575) ; v3(57.15,28.575) 57.15,36.474 58.033,37.358 58.033,39.223 R6.1@57.201,39.223 ; v1(58.039,39.218) 58.039,39.624 J4.10@59.055,40.64
  Mid-Layer 1 w0.152: v3(48.311,28.575) v3(57.15,28.575)
IMCU_SWDCLK: J4.4 TP48.1 U2.W31 | length 27.8
  Top Layer w0.125: U2.W31@47.795,29.429 U2.W31@47.776,29.448 v3(48.454,29.448)
  Top Layer w0.152: v3(57.861,29.515) 57.861,35.814 61.72,39.673 61.72,43.563 v1@61.138,44.145 ; J4.4@60.325,44.45 60.833,44.45 v1@61.138,44.145 ; v1@61.151,44.145 v1@61.138,44.145
  Mid-Layer 1 w0.152: v3(48.454,29.448) 48.692,29.21 57.125,29.21 57.429,29.515 v3(57.861,29.515)
  other v1: 61.151,44.12
IMCU_SWDIO: J4.2 TP21.1 U2.AA31 | length 24.7
  Top Layer w0.125: U2.AA31@47.776,29.048 v3(48.2,29.048)
  Top Layer w0.152: v3(57.506,28.931) 57.506,35.89 61.316,39.7 61.316,40.919 v1(60.325,41.91)
  Mid-Layer 1 w0.152: v3(48.2,29.048) 48.317,28.931 v3(57.506,28.931)
MX25_C\S\: SB13.2 U7.1 | length 2
  Top Layer w0.203: U7.1@118.83,19.863 SB13.2@120.802,19.863
MX25_SCLK: SB11.2 U7.6 | length 2
  Top Layer w0.152: SB11.2@111.318,22.403 U7.6@113.29,22.403
MX25_SIO0: SB12.2 U7.5 | length 2
  Top Layer w0.152: SB12.2@111.318,23.673 U7.5@113.29,23.673
MX25_SIO1: SB14.2 U7.2 | length 2
  Top Layer w0.152: U7.2@118.83,21.133 SB14.2@120.802,21.133
MX25_SIO2: SB15.2 U7.3 | length 2
  Top Layer w0.152: U7.3@118.83,22.403 SB15.2@120.802,22.403
MX25_SIO3: SB10.2 U7.7 | length 2
  Top Layer w0.152: SB10.2@111.318,21.133 U7.7@113.29,21.133
N\R\F\_\O\N\L\Y\: R44.1 TP22.1 U4.B2 | length 77.3
  Top Layer w0.152: v2(85.928,47.803) 85.928,35.56 85.725,35.357 85.725,32.924 85.649,32.848 85.649,24.359 88.367,21.641 88.367,17.196 88.895,16.668 88.895,11.588 89.84,10.643 R44.1@89.84,9.048 ; v1(117.577,47.803) v1(117.577,50.597) 117.577,51.333 118.335,52.092 U4.B2@118.799,52.092
  Mid-Layer 1 w0.152: v2(85.928,47.803) v1(104.165,47.803)
  Mid-Layer 2 w0.152: v1(104.165,47.803) v1(117.577,47.803)
NetC1_2: C1.2 L1.1 U1.L31 | length 2.8
  Top Layer w0.225: C1.2@120.363,38.389 U1.L31@119.278,38.389 120.933,38.389 L1.1@120.949,38.405
NetC5_2: C5.2 L3.1 U1.A15 | length 4.9
  Top Layer w0.225: L3.1@115.603,44.364 115.631,44.364 116.328,43.667 C5.2@116.328,43.364 ; U1.A15@115.878,40.589 115.878,40.789 ; C5.2@116.328,43.344 C5.2@116.328,43.364 ; 115.878,40.789 116.328,41.239 ; 115.878,40.789 116.328,41.239 ; 116.328,41.239 116.328,42.889 C5.2@116.328,43.364
NetC17_1: C17.1 R1.2 U1.A5 | length 10.3
  Top Layer w0.125: v1@108.179,42.774 v1(108.183,42.769)
  Top Layer w0.15: U1.A5@113.878,40.589 113.903,40.614 U1.A5@113.878,40.589
  Top Layer w0.2: C17.1@110.803,42.619 110.953,42.769 110.953,42.489 111.587,41.854 111.867,41.854 ; 111.867,41.854 113.178,41.854 ; 111.867,41.854 113.178,41.854 ; 113.178,41.854 113.878,41.155 ; 113.178,41.854 113.878,41.155 ; 113.878,41.155 U1.A5@113.878,40.589 113.878,41.155
  Top Layer w0.381: R1.2@107.874,42.774 v1@108.179,42.774
  Mid-Layer 2 w0.381: v1(108.183,42.769) v1(110.653,42.769)
NetC22_1: C22.1 Q9.1 R8.2 U12.B2 | length 9.4
  Top Layer w0.203: v3(25.095,18.364) U12.B2@25.378,18.082 ; v3(31.928,19.66) 32.227,19.66 R8.2@32.258,19.629 ; Q9.1@32.254,18.384 C22.1@32.254,19.015 R8.2@32.254,19.625
  Mid-Layer 1 w0.152: v3(25.095,18.364) 25.451,18.72 28.575,18.72 29.515,19.66 v3(31.928,19.66)
NetC26_2: C26.2 C27.1 U2.A27 U2.G31 | length 7.5
  Top Layer w0.152: U2.G31@47.776,31.848 48.213,31.848 48.387,31.674 C27.1@49.141,31.674 v3(49.141,31.996)
  Top Layer w0.2: U2.A27@46.776,33.248 46.776,33.592 47.531,34.347 v3(48.151,34.347) 48.2,34.347 48.551,34.698 C26.2@48.551,35.098
  Mid-Layer 1 w0.152: v3(48.151,34.347) 48.151,32.986 v3(49.141,31.996)
NetC39_2: C39.2 U2.A15 | length 2.7
  Top Layer w0.225: C39.2@44.326,35.853 44.526,35.653 44.526,33.598 44.376,33.448 U2.A15@44.376,33.248
NetC40_1: C40.1 R10.2 U2.A5 | length 6
  Top Layer w0.15: U2.A5@42.376,33.248 U2.A5@42.401,33.273
  Top Layer w0.18: U2.A5@42.396,33.273 42.396,33.363
  Top Layer w0.2: C40.1@39.301,35.278 39.451,35.428 39.451,35.148 40.086,34.514 41.677,34.514 42.376,33.814 U2.A5@42.376,33.248
  Top Layer w0.3: R10.2@38.1,36.062 38.517,36.062 C40.1@39.151,35.428
NetC46_2: C46.2 SB16.2 SB17.2 SB18.2 U7.8 | length 5.2
  Top Layer w0.305: SB16.2@108.161,19.921 109.099,19.921 109.763,19.921 110.369,19.921 111.033,19.921 113.232,19.921 U7.8@113.29,19.863
NetC47_2: C47.2 C51.2 C52.2 D1.4 FB1.1 J3.1 TP15.1 | length 14.1
  Top Layer w0.508: v1(106.335,53.772) C51.2@106.335,52.897 106.971,52.897 107.657,52.21 D1.4@108.506,52.21 ; J3.1@110.529,57.268 110.529,56.816 v1(110.959,56.387) 113.562,56.387 113.809,56.634 FB1.1@114.852,56.634
  Bottom Layer w0.508: v1(106.335,53.772) 108.95,56.387 v1(110.959,56.387)
NetC49_1: C49.1 C53.2 C54.2 D2.4 FB2.1 J2.1 TP11.1 | length 28.9
  Top Layer w0.254: C53.2@9.297,29.058 9.297,30.522 D2.4@9.83,31.055
  Top Layer w0.508: v1(2.261,45.009) 5.283,41.986 5.283,39.446 7.003,37.727 FB2.1@7.264,37.727 7.264,33.731 v2(7.239,33.706) 6.583,33.05 J2.1@6.232,33.05 ; v2(8.738,28.498) C53.2@9.297,29.058
  Mid-Layer 1 w0.508: v2(7.239,33.706) 6.299,33.706 5.105,32.512 5.105,29.261 5.868,28.498 v2(8.738,28.498)
  Bottom Layer w0.508: TP11.1@1.346,45.923 v1(2.261,45.009)
NetC55_2: C55.2 FB5.1 J3.6@105.929,59.943 J3.6@106.029,57.493 J3.6@108.029,59.943 J3.6@110.429,59.943 J3.6@112.429,57.493 J3.6@112.529,59.943 R55.2 | length 3
  Top Layer w0.254: FB5.1@103.016,59.67 103.206,59.86 C55.2@103.854,59.86 105.845,59.86 J3.6@105.929,59.943
NetC56_2: C56.2 FB6.1 J2.6@3.557,28.45 J2.6@3.557,30.55 J2.6@3.557,32.95 J2.6@3.557,35.05 J2.6@6.007,28.55 J2.6@6.007,34.95 R56.2 | length 3.3
  Top Layer w0.508: FB6.1@3.146,25.317 3.146,28.039 J2.6@3.557,28.45
NetC58_1: C58.1 R59.1 R62.2 U10.7 | length 7.2
  Top Layer w0.254: C58.1@6.401,25.152 7.087,25.152 7.089,25.149 7.089,25.134 7.097,25.126 R59.1@7.112,25.126 R59.1@7.112,25.152 ; R62.2@7.849,25.394 7.834,25.394 7.826,25.386 7.826,25.371 7.606,25.152 R59.1@7.112,25.152 ; U10.7@11.074,26.914 7.381,26.914 7.112,26.645 R59.1@7.112,25.152
NetC61_2: C61.2 D4.3 U11.4 U11.6 | length 10.3
  Top Layer w0.25: 21.856,21.184 21.857,21.182 21.871,21.168
  Top Layer w0.254: U11.4@21.701,19.718 22.284,19.718 22.657,20.091 22.657,21.031 22.352,21.336 21.857,21.336
  Top Layer w0.508: D4.3@19.507,27.268 20.862,25.914 20.862,24.477 21.857,23.482 C61.2@21.857,22.784 ; 21.857,20.874 21.857,21.182 21.857,21.336 C61.2@21.857,22.76
NetC62_1: C62.1 R60.1 R63.2 U11.3 | length 3.1
  Top Layer w0.152: R60.1@19.335,18.085 R60.1@19.36,18.085 ; C62.1@19.36,17.526 R60.1@19.36,18.085 ; U11.3@19.751,19.718 19.651,19.718 19.36,19.427 R60.1@19.36,18.085 ; R63.2@20.01,18.085 R60.1@19.36,18.085
NetC64_2: C64.2 U10.3 | length 2.4
  Top Layer w0.254: U10.3@13.614,26.414 14.175,26.414 14.427,26.666 14.427,27.33 14.808,27.711 C64.2@15.133,27.711
NetC66_2: C66.2 SB81.2 SW9.7 U15.A2 | length 30.1
  Top Layer w0.203: 53.54,40.161 U15.A2@53.54,40.719
  Top Layer w0.762: SW9.7@25.749,39.906 25.749,39.326 26.543,38.532 v1(31.013,38.532) ; v1(45.796,39.802) 47.066,39.802 ; 47.125,39.802 53.181,39.802 53.54,40.161
  Mid-Layer 2 w0.762: v1(31.013,38.532) 36.678,38.532 38.202,40.056 45.542,40.056 v1(45.796,39.802)
NetC72_1: C72.1 U2.B6 | length 4.2
  Top Layer w0.187: C72.1@40.276,35.423 40.867,34.832 41.809,34.832 42.707,33.934 42.707,33.122 ; C72.1@40.576,35.423 C72.1@40.576,35.428 ; U2.B6@42.576,32.848 42.707,33.118
NetC73_1: C73.1 U2.A23 | length 1.2
  Top Layer w0.2: C73.1@45.81,34.348 45.81,33.889 45.976,33.723 U2.A23@45.976,33.248
NetC74_2: C74.2 U2.A13 | length 1.9
  Top Layer w0.225: U2.A13@43.976,33.248 C74.2@43.976,35.153
NetFB3_1: FB3.1 J3.5 TP16.1 | length 8.1
  Top Layer w0.508: v1(104.089,54.28) 104.1,54.291 105.345,54.291 ; FB3.1@105.345,52.417 105.345,54.291 ; J3.5@107.929,57.268 107.929,56.875 105.345,54.291
  Bottom Layer w0.508: TP16.1@103.347,53.857 103.769,54.28 v1(104.089,54.28)
NetFB4_1: FB4.1 J2.5 | length 1.7
  Top Layer w0.254: J2.5@6.232,30.45 6.609,30.45 6.985,30.074 6.985,29.864 FB4.1@7.413,29.435
NetL2_2: L2.2 U1.A21 | length 5.5
  Top Layer w0.225: 117.828,42.339 117.078,41.589 ; L2.2@118.378,43.464 117.903,42.989 117.903,42.414 117.078,41.589 ; 117.078,41.589 U1.A21@117.078,40.589 117.078,41.589
NetL3_2: L3.2 U1.B10 | length 4.9
  Top Layer w0.187: L3.2@114.378,44.414 113.928,43.964 113.928,42.438 114.835,41.531 U1.B10@114.835,40.232 ; U1.B10@114.835,40.232 U1.B10@114.878,40.189 ; U1.B10@114.835,40.232 U1.B10@114.878,40.189 ; U1.B10@114.835,40.232 U1.B10@114.878,40.189
NetL4_2: L4.2 U1.J1 | length 8.4
  Top Layer w0.187: L4.2@108.665,38.351 L4.2@109.09,38.351 ; L4.2@109.09,38.351 111.74,38.351 ; L4.2@109.09,38.351 111.74,38.351 ; 111.74,38.351 112.178,38.789 ; 111.74,38.351 112.178,38.789 ; 112.178,38.789 U1.J1@112.878,38.789 112.178,38.789
NetL6_1: L6.1 U11.1 | length 2.6
  Top Layer w0.508: L6.1@17.399,21.369 19.151,21.369 U11.1@19.751,20.768
NetL7_1: L7.1 U10.2 | length 2.9
  Top Layer w0.457: U10.2@13.614,25.764 14.232,25.764 15.273,26.805 L7.1@16.104,26.805
NetLED1_1: LED1.1 SB5.2 | length 2.5
  Top Layer w0.152: SB5.2@121.589,56.547 123.39,56.547 LED1.1@123.859,57.016
NetLED1_2: LED1.2 R2.1 | length 1.3
  Top Layer w0.203: LED1.2@125.256,57.016 R2.1@126.558,57.016
NetLED2_1: LED2.1 SB6.2 | length 7.7
  Top Layer w0.152: SB6.2@121.589,57.97 127.985,57.97 LED2.1@128.939,57.016
NetLED2_2: LED2.2 R3.1 | length 1.3
  Top Layer w0.203: LED2.2@130.336,57.016 R3.1@131.638,57.016
NetLED3_1: LED3.1 SB7.2 | length 2.3
  Top Layer w0.152: SB7.2@121.589,53.702 123.718,53.702 LED3.1@123.859,53.562
NetLED3_2: LED3.2 R4.1 | length 1.3
  Top Layer w0.203: LED3.2@125.256,53.562 R4.1@126.558,53.562
NetLED4_1: LED4.1 SB8.2 | length 8
  Top Layer w0.152: SB8.2@121.589,55.125 127.376,55.125 LED4.1@128.939,53.562
NetLED4_2: LED4.2 R5.1 | length 1.3
  Top Layer w0.203: LED4.2@130.336,53.562 R5.1@131.638,53.562
NetLED5_1: LED5.1 Q1.3 | length 1.1
  Top Layer w0.203: Q1.3@37.699,23.749 37.699,24.834 LED5.1@37.719,24.854
NetLED5_2: LED5.2 R7.1 | length 1.2
  Top Layer w0.165: LED5.2@37.719,26.251 R7.1@37.719,27.426
NetP1_3: P1.3 P5.5 P7.3 P11.5 P13.6 SB43.2 SB44.1 U6.4 | length 95.7
  Top Layer w0.152: P1.3@33.02,9.085 P1.3@33.02,9.906 ; v1(62.674,29.401) P5.5@62.674,30.48 ; U6.4@76.61,19.691 76.616,19.685 v2(77.216,19.685) 77.791,19.685 77.797,19.691 77.934,19.691 SB44.1@77.97,19.727 ; v3(78.41,29.515) 78.41,22.86 79.299,21.971 v2(79.299,20.396) 79.299,17.823 78.744,17.268 SB43.2@78.595,17.12 ; v2(78.595,12.54) 78.595,16.766
  Top Layer w0.381: P13.6@33.02,3.81 P1.3@33.02,6.155 v1(33.02,7.62) P1.3@33.02,9.085
  Mid-Layer 1 w0.152: v1(33.02,7.62) 35.128,9.728 69.151,9.728 71.894,12.471 78.527,12.471 v2(78.595,12.54) ; v1(62.674,29.401) 62.801,29.527 64.389,29.527 78.397,29.527 v3(78.41,29.515) ; v2(77.216,19.685) 77.927,20.396 v2(79.299,20.396)
  Bottom Layer w0.152: v1(62.674,29.401) P11.5@62.674,30.594
  Bottom Layer w0.381: P7.3@33.02,6.155 v1(33.02,7.62) P7.3@33.02,9.085
NetP5_6: P5.6 P11.6 SB32.2 SB33.1 | length 6.7
  Top Layer w0.152: SB33.1@66.065,27.795 66.091,27.77 66.906,27.77 SB32.2@67.259,27.77 67.252,27.777 67.252,27.944 67.252,30.348 P5.6@67.119,30.48 67.285,30.645 v1(67.285,31.699)
  Bottom Layer w0.152: v1(67.285,31.699) 67.285,30.917 P11.6@67.722,30.48
NetP6_3: P6.3 P12.3 P17.6 R42.1 | length 62.5
  Top Layer w0.152: P6.3@81.28,54.661 P6.3@81.28,54.415 81.001,54.136 81.001,40.361 81.94,39.421 v3(81.94,26.01) ; v2(84.938,26.01) 84.938,24.079 87.63,21.387 v2(87.63,18.466) ; R42.1@100.909,19.126 100.914,19.121 v2(100.914,18.821)
  Top Layer w0.381: P6.3@81.28,54.661 v1(81.28,55.88) P6.3@81.28,57.345 P17.6@81.28,59.69
  Mid-Layer 1 w0.152: v3(81.94,26.01) v2(84.938,26.01) ; v2(87.63,18.466) 99.924,18.466 100.279,18.821 v2(100.914,18.821)
  Bottom Layer w0.381: P12.3@81.28,54.415 v1(81.28,55.88) P12.3@81.28,57.345
NetP6_4: P6.4 P12.4 P17.8 R45.1 | length 67.3
  Top Layer w0.152: P6.4@78.74,54.415 78.74,53.797 80.645,51.892 80.645,30.48 81.559,29.566 v3(81.559,25.654) ; v2(85.293,25.654) 85.293,24.206 88.011,21.488 v2(88.011,18.11) ; v2(104.146,18.802) R45.1@104.146,19.126
  Top Layer w0.381: P6.4@78.74,54.415 v1(78.74,55.88) P6.4@78.74,57.345 P17.8@78.74,59.69
  Mid-Layer 1 w0.152: v3(81.559,25.654) v2(85.293,25.654) ; v2(88.011,18.11) 100.813,18.11 101.504,18.802 v2(104.146,18.802)
  Bottom Layer w0.381: P12.4@78.74,54.415 v1(78.74,55.88) P12.4@78.74,57.345
NetP19_1: P19.1 SB19.2 SB47.2 | length 8.2
  Top Layer w0.254: P19.1@5.836,56.236 7.595,56.236 8.298,56.939 8.298,60.785 SB19.2@8.298,61.138 8.298,61.491 8.298,62.055 SB47.2@8.298,62.408
NetP20_3: P20.3 P26.3 Q2.1 R25.1 | length 60.3
  Top Layer w0.152: Q2.1@50.453,27.636 50.453,28.298 R25.1@50.475,28.321 53.518,28.321 54.178,28.981 v3(54.178,47.65)
  Top Layer w0.508: P20.3@23.876,44.255 v1(23.876,45.72) P20.3@23.876,47.185
  Mid-Layer 1 w0.152: v1(23.876,45.72) 25.806,47.65 v3(54.178,47.65)
  Bottom Layer w0.508: P26.3@23.876,44.255 v1(23.876,45.72) P26.3@23.876,47.185
NetP20_4: P20.4 P26.4 R19.2 | length 54.6
  Top Layer w0.152: R19.2@53.797,27.488 54.534,28.225 v2(54.534,47.295)
  Top Layer w0.508: P20.4@26.416,44.348 P20.4@26.416,47.185
  Mid-Layer 1 w0.152: v1(26.416,45.72) 27.991,47.295 v2(54.534,47.295)
  Bottom Layer w0.508: P26.4@26.416,44.255 v1(26.416,45.72) P26.4@26.416,47.185
NetP20_5: P20.5 P26.5 R21.2 | length 52
  Top Layer w0.152: R21.2@54.398,27.488 54.889,27.979 v3(54.889,46.939)
  Top Layer w0.508: P20.5@28.956,44.255 P20.5@28.956,47.185
  Mid-Layer 1 w0.152: v1(28.956,45.72) 30.175,46.939 v3(54.889,46.939)
  Bottom Layer w0.508: P26.5@28.956,44.255 v1(28.956,45.72) P26.5@28.956,47.185
NetP20_6: P20.6 P26.6 R22.2 | length 49.8
  Top Layer w0.152: P20.6@31.496,43.663 P20.6@31.496,44.255 ; R22.2@54.999,27.488 55.245,27.734 v3(55.245,46.584)
  Top Layer w0.508: P20.6@31.496,44.255 v1(31.496,45.72) P20.6@31.496,47.185
  Mid-Layer 1 w0.152: v1(31.496,45.72) 32.36,46.584 v3(55.245,46.584)
  Bottom Layer w0.508: P26.6@31.496,44.255 v1(31.496,45.72) P26.6@31.496,47.185
NetP20_7: P20.7 P26.7 R23.2 | length 47
  Top Layer w0.152: P20.7@34.036,43.663 P20.7@34.036,44.255 ; R23.2@55.601,27.488 v2(55.601,46.228)
  Top Layer w0.508: P20.7@34.036,44.255 v1(34.036,45.72) P20.7@34.036,47.185
  Mid-Layer 1 w0.152: v1(34.036,45.72) 34.544,46.228 v2(55.601,46.228)
  Bottom Layer w0.508: P26.7@34.036,44.255 v1(34.036,45.72) P26.7@34.036,47.185
NetP20_8: P20.8 P26.8 | length 6.5
  Top Layer w0.152: P20.8@36.576,43.637 P20.8@36.576,44.255
  Top Layer w0.508: P20.8@36.576,44.255 v1(36.576,45.72) P20.8@36.576,47.185
  Bottom Layer w0.508: P26.8@36.576,44.255 v1(36.576,45.72) P26.8@36.576,47.185
NetP20_13: P20.13 P26.13 R75.2 | length 7.9
  Top Layer w0.254: P20.13@49.276,44.255 49.288,44.267 R75.2@51.308,44.267
  Top Layer w0.762: P20.13@49.276,44.255 P20.13@49.276,47.185
  Bottom Layer w0.762: P26.13@49.276,44.255 P26.13@49.276,47.185
  other v1: 49.276,45.72
NetP21_2: P21.2 SW10.2 SW10.4 TP27.1 | length 23.4
  Top Layer w0.508: P21.2@11.811,18.009 P21.2@12,18.009 12.751,18.009 12.852,17.907 12.852,15.672 v1(13.462,15.062) ; v1(17.831,6.248) 17.831,5.004 18.212,4.623 20.574,4.623 ; SW10.2@20.625,5.914 20.625,4.674 20.574,4.623 ; SW10.4@22.375,2.214 22.375,2.822 20.574,4.623
  Bottom Layer w0.508: v1(13.462,15.062) 13.792,14.732 13.792,14.432 16.916,11.307 16.916,7.163 v1(17.831,6.248)
NetP24_3: P24.3 SB22.2 | length 52.4
  Top Layer w0.152: v2(88.494,22.479) 88.494,34.925 89.103,35.535 89.103,48.209 91.694,50.8 P24.3@93.027,50.8 ; v2(108.966,23.673) 109.223,23.673 SB22.2@109.398,23.673
  Mid-Layer 1 w0.152: v2@88.494,22.479 106.858,22.479 108.052,23.673 v2(108.966,23.673)
NetP24_4: P24.4 SB24.2 | length 70.2
  Top Layer w0.152: P24.4@97.472,50.8 98.755,50.8 100.711,48.844 100.711,39.802 101.168,39.345 101.168,34.671 101.829,34.011 101.829,21.615 99.466,19.253 v2(99.466,14.326) ; v2(122.25,14.326) 122.25,17.221 123.215,18.186 123.215,20.64 122.871,20.984 SB24.2@122.723,21.133
  Mid-Layer 1 w0.152: v2(99.466,14.326) v2(122.25,14.326)
NetP24_5: P24.5 SB25.2 | length 80.3
  Top Layer w0.152: v2(89.256,13.538) 89.256,16.815 88.9,17.17 88.9,19.279 89.129,19.507 89.129,25.984 88.773,26.34 88.773,34.798 89.459,35.484 89.459,45.974 91.745,48.26 P24.5@93.027,48.26 ; v2(122.606,13.945) 122.606,17.069 123.546,18.009 123.546,21.58 122.871,22.254 SB25.2@122.723,22.403
  Mid-Layer 1 w0.152: v2(89.256,13.538) 95.936,13.538 96.342,13.945 98.501,13.945 v2(122.606,13.945)
NetP24_6: P24.6 SB20.2 | length 37.1
  Top Layer w0.152: P24.6@97.472,48.26 98.806,48.26 100.432,46.634 100.432,39.675 100.857,39.249 100.857,34.576 101.473,33.96 v2@101.473,21.819 ; v2(108.941,21.133) 109.223,21.133 SB20.2@109.398,21.133
  Mid-Layer 1 w0.152: v2(101.473,21.768) 106.985,21.768 107.62,21.133 v2(108.941,21.133)
NetP24_7: P24.7 SB21.2 | length 46.1
  Top Layer w0.152: v2(89.484,22.123) 89.484,26.162 89.129,26.518 89.129,34.747 89.814,35.433 89.814,43.79 91.745,45.72 P24.7@93.027,45.72 ; v2(108.941,22.403) 109.223,22.403 SB21.2@109.398,22.403
  Mid-Layer 1 w0.152: v2@89.484,22.123 108.661,22.123 v2(108.941,22.403)
NetP24_8: P24.8 SB23.2 | length 62.4
  Top Layer w0.152: P24.8@97.472,45.72 98.781,45.72 100.152,44.348 100.152,39.548 100.546,39.154 100.546,34.48 101.117,33.909 101.117,21.438 99.111,19.431 v2(99.111,14.699) ; v2(121.877,14.699) 121.877,17.305 122.723,18.151 122.723,19.51 SB23.2@122.723,19.863
  Mid-Layer 1 w0.152: v2(99.111,14.699) v2(121.877,14.699)
NetP28_1: P28.1 U9.5 | length 3.4
  Top Layer w0.381: U9.5@27.893,24.806 28.509,24.806 30.455,22.86 P28.1@30.48,22.86
NetP28_2: P28.2 U9.6 | length 2.6
  Top Layer w0.381: U9.6@27.893,25.456 30.424,25.456 P28.2@30.48,25.4
NetP28_3: P28.3 U9.7 | length 3.7
  Top Layer w0.381: U9.7@27.893,26.106 29.179,26.106 30.48,27.407 P28.3@30.48,27.94
NetQ3_3: Q3.3 R12.2 | length 1.2
  Top Layer w0.203: Q3.3@33.147,18.384 R12.2@33.147,19.629